# Altium PCB HDMI_Adapter_RevA.PcbDoc
Units mm, origin at the board's own origin, x right, y up, seen from the top; angles counter-clockwise.
Board outline 60 x 40 mm, 2 copper layers (Top Layer, Bottom Layer); 13 components, 11 nets, 74 pads, 8 vias.
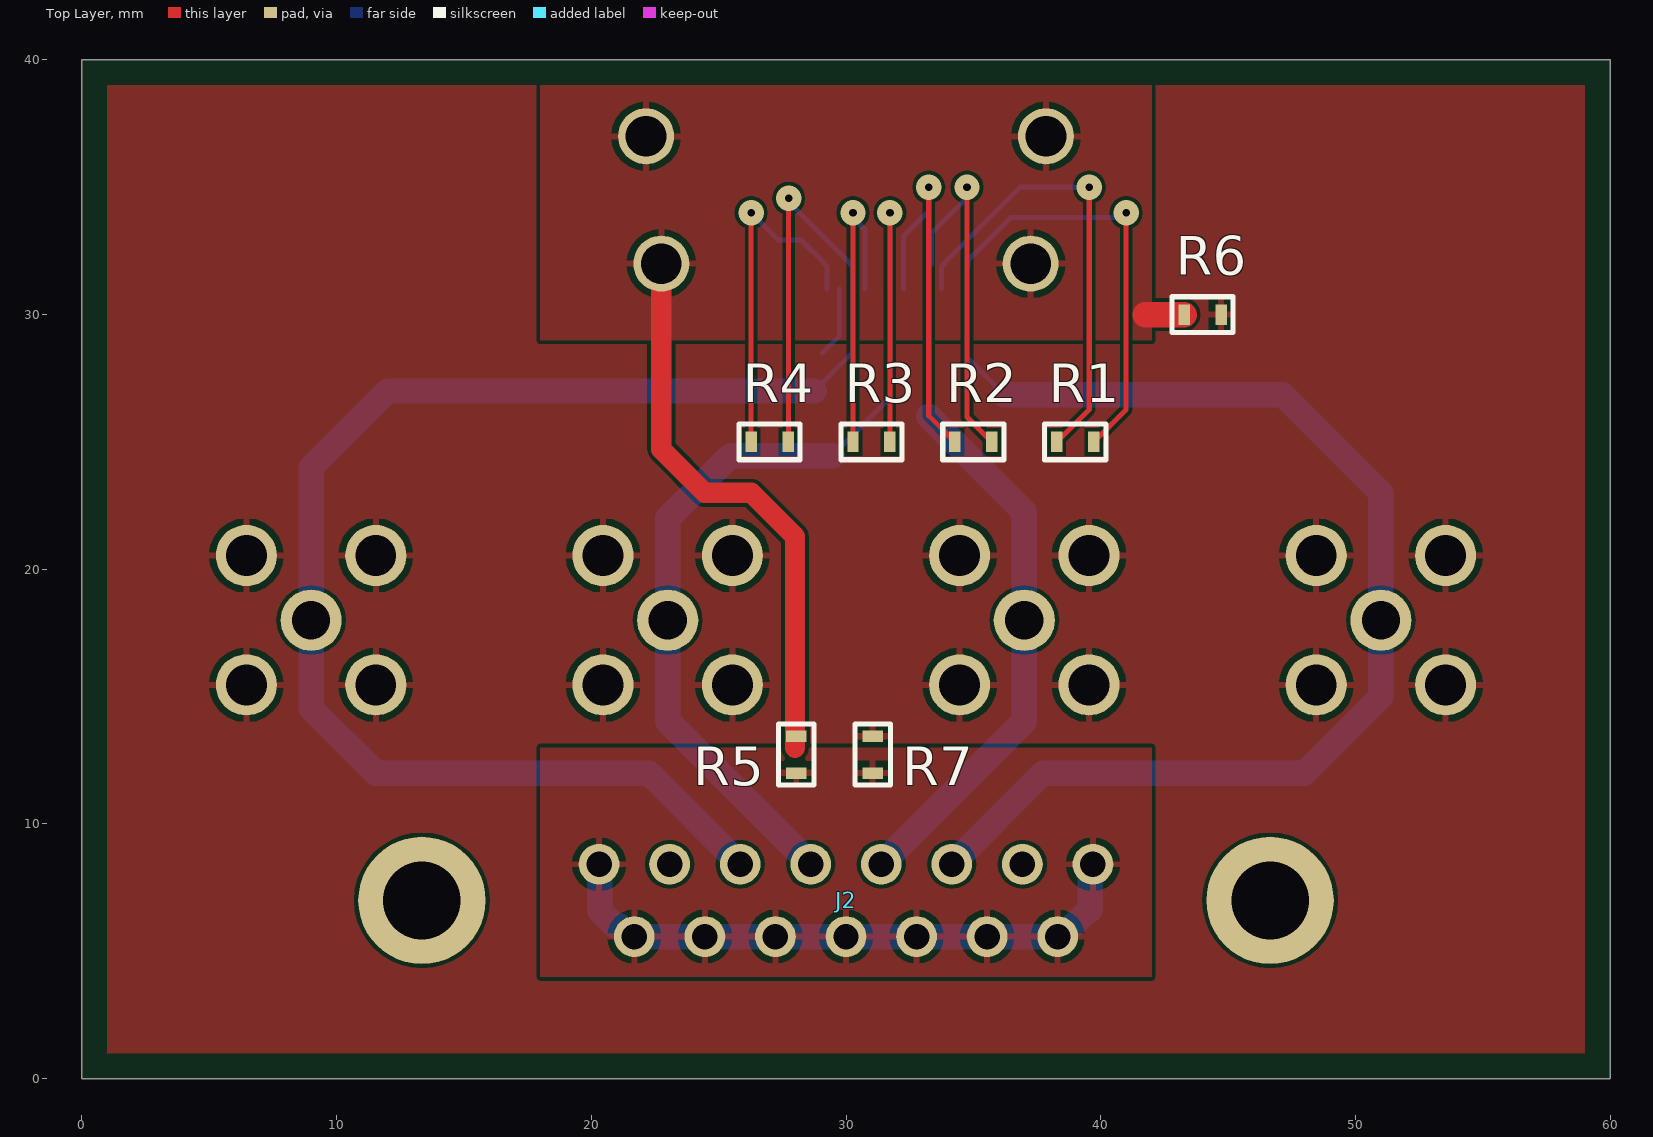
[diagram p0: Top Layer view]
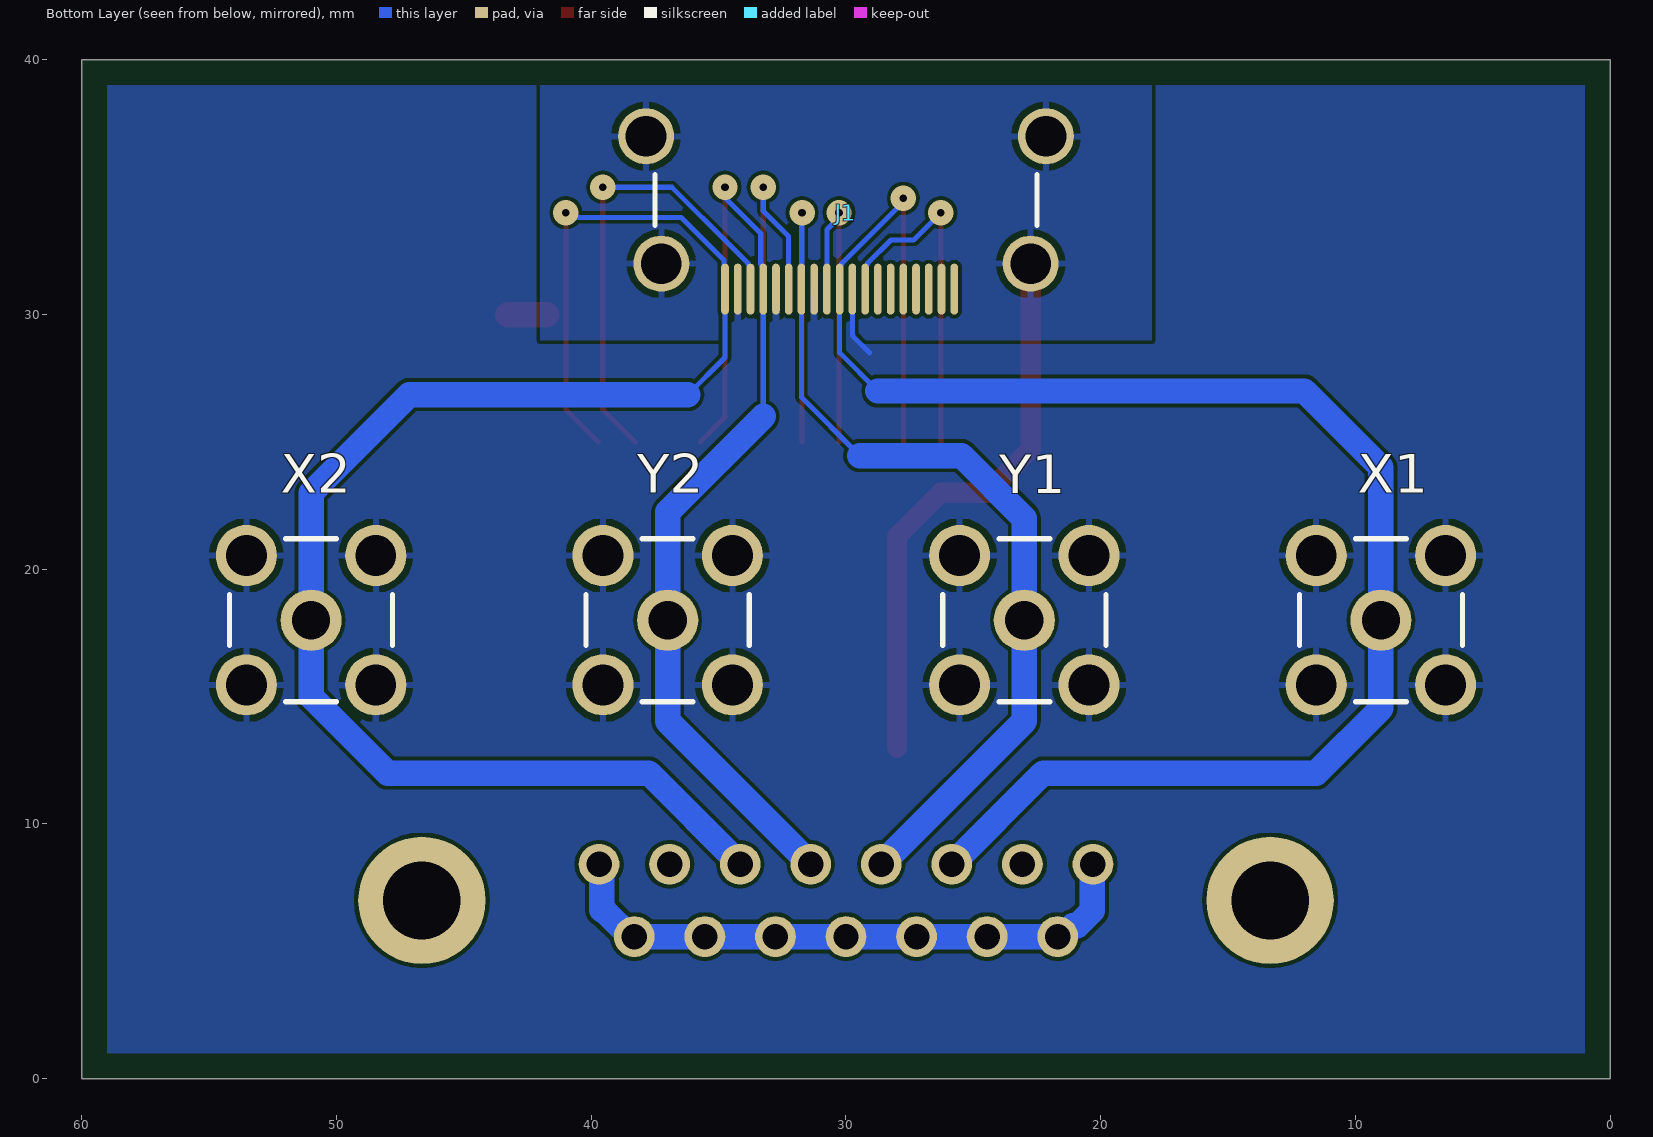
[diagram p1: Bottom Layer view, seen from below]
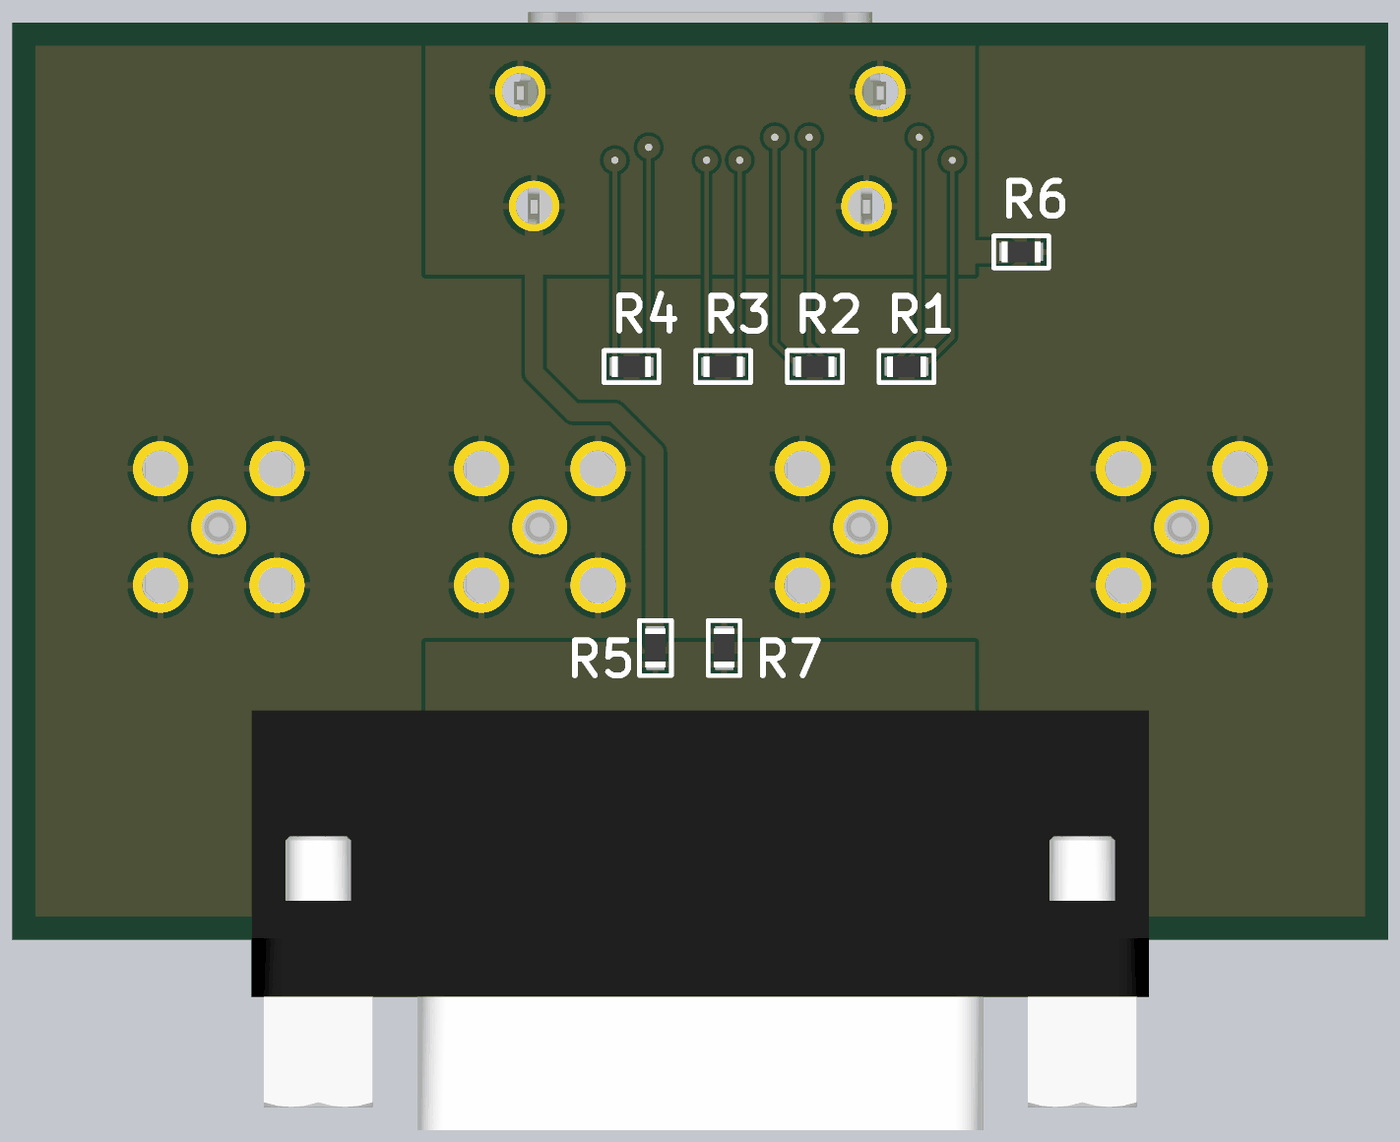
[diagram p2: 3D render of the assembled board from above, using the file's embedded part models]
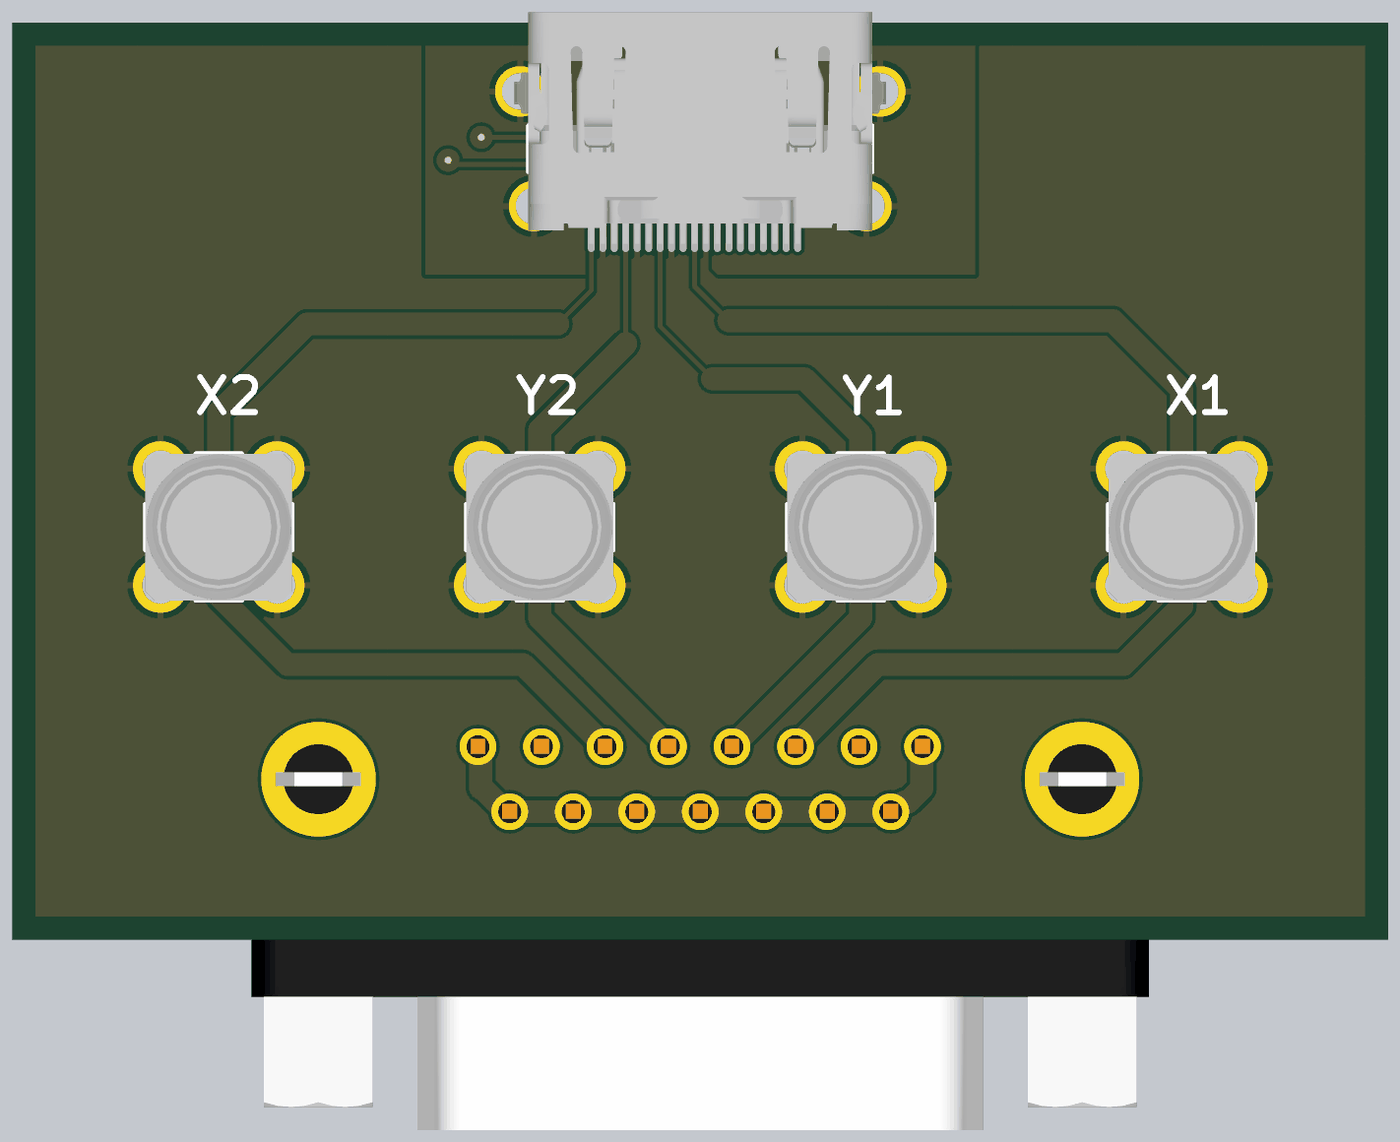
[diagram p3: 3D render of the assembled board from below, using the file's embedded part models]

## Layer stack, top to bottom
Top Solder: solder mask 0.0102, Solder Resist, Dk 3.5
Top Layer: signal copper 0.0356
Dielectric 1: dielectric 0.32, FR-4, Dk 4.8
Bottom Layer: signal copper 0.0356
Bottom Solder: solder mask 0.0102, Solder Resist, Dk 3.5

## Board outline
0,0 60,0 60,40 0,40

## Design rules (kind name [scope] priority, off if disabled: settings)
Clearance [All] p1: gap=0.152 ignorepadtopadclearanceinfootprint=FALSE
HoleSize [All] p1: absolutevalues=TRUE maxlimit=6.3 minlimit=0.3 maxpercent=80.000 minpercent=20.000
PolygonConnect [All] p1: connectstyle=Relief reliefconductorwidth=0.254 reliefentries=4 polygonreliefangle="90 Angle" airgapwidth=0.254
RoutingVias [All] p1: holewidth=0.711 width=1.27 viastyle="Through Hole" minholewidth=0.711 minwidth=1.27 maxholewidth=0.711 maxwidth=1.27
SolderMaskExpansion [All] p1: expansion=0
Width [All] p1: maxlimit=5 minlimit=0.152 preferedwidth=0.254
29 further rules are at their usual default settings.

## Components (designator, comment, footprint, x,y, rotation, side; value= is the part's Value field where it differs from the comment)
J1 "10029449-111RLF" 10029449-111RLF 30,32 r0 bottom
J2 "A-DF 15 A/KG-T2S" "A-DF 15 A/KG-T2S" 30,7 r0 top
R1 "RES 0R Jumper 1/10 W 0603" RES-0603-M 39,25 r180 top value=0R
R2 "RES 0R Jumper 1/10 W 0603" RES-0603-M 35,25 r180 top value=0R
R3 "RES 0R Jumper 1/10 W 0603" RES-0603-M 31,25 r180 top value=0R
R4 "RES 0R Jumper 1/10 W 0603" RES-0603-M 27,25 r0 top value=0R
R5 "RES 0R Jumper 1/10 W 0603" RES-0603-M 28.046,12.725 r90 top value=0R
R6 "RES 0R Jumper 1/10 W 0603" RES-0603-M 44,30 r0 top value=0R
R7 "RES 0R Jumper 1/10 W 0603" RES-0603-M 31.046,12.725 r90 top value=0R
X1 "5-1814832-1" 5-1814832-1 9,18 r180 bottom
X2 "5-1814832-1" 5-1814832-1 51,18 r180 bottom
Y1 "5-1814832-1" 5-1814832-1 23,18 r180 bottom
Y2 "5-1814832-1" 5-1814832-1 37,18 r180 bottom

## Footprints (in the part's own frame and the unit in brackets; to place one, negate y for a bottom-side part, rotate by r counter-clockwise, add the part's x,y. Pads: shape width x height; smd on the part's side, far side on the other; paste and mask are expansions set on the pad)
5-1814832-1 [mm]
  round 2.4 hole 1.5: 1(0,0)
  round 2.4 hole 1.6: MH(-2.54,-2.54) MH(-2.54,2.54) MH(2.54,-2.54) MH(2.54,2.54)
  silkscreen extent -3.2,-3.2 3.2,3.2, body extent -3.2,-3.2 3.2,3.2, height 9.5
10029449-111RLF [mm]
  oval 0.3x2 smd: 1(4.75,1) 2(4.25,1) 3(3.75,1) 4(3.25,1) 5(2.75,1) 6(2.25,1) 7(1.75,1) 8(1.25,1) 9(0.75,1) 10(0.25,1) 11(-0.25,1) 12(-0.75,1) 13(-1.25,1) 14(-1.75,1) 15(-2.25,1) 16(-2.75,1) 17(-3.25,1) 18(-3.75,1) 19(-4.25,1)
  round 2.2 hole 1.6: MH1(7.25,0) MH2(7.85,-5) MH3(-7.25,0) MH4(-7.85,-5)
  silkscreen extent -7.5,-3.5 7.5,-1.5, body extent -8.1,-8.45 8.1,1.65, height 6.28
"A-DF 15 A/KG-T2S" [mm]
  round 1.6 hole 1: 1(9.695,1.42) 2(6.925,1.42) 3(4.155,1.42) 4(1.385,1.42) 5(-1.385,1.42) 6(-4.155,1.42) 7(-6.925,1.42) 8(-9.695,1.42) 9(8.31,-1.42) 10(5.54,-1.42) 11(2.77,-1.42) 12(0,-1.42) 13(-2.77,-1.42) 14(-5.54,-1.42) 15(-8.31,-1.42)
  round 5 hole 3.05: MH1(16.65,0) MH2(-16.65,0)
  body extent -19.57,-15.3 19.57,3, height 12.77
RES-0603-M [mm] "Chip Resistor, 2-Leads, Body 1.60x0.80mm, IPC High Density"
  rect 0.45x0.8 smd: 1(-0.725,0) 2(0.725,0)
  silkscreen extent -1.2,-0.7 1.2,0.7, body extent -0.85,-0.45 0.85,0.45, height 0.55

## Part data
J2: "DA-15 Female, RIght Angle"
R1 R2 R3 R4 R5 R6 R7: library part RC0603FR-070RL, Manufacturer=Yageo, Manufacturer Series=RC, Package=0603, Power="1/10 W", Supplier Part Number 1=311-0.0HRCT-ND, Temperature Range="-55°C ~ 155°C", Tolerance=Jumper, Component Type=Standard, Part Number=RC0603FR-070RL, Supplier 1=Digi-Key

## Via types
v1: diameter 1, hole 0.3, Top Layer to Bottom Layer, tented both sides, 8 vias

## Nets (pads, with @x,y where several pads share a name; then routed paths per layer and width w, separated by ;. In a path a pad name is that pad's centre, name@x,y a point inside that pad or via, vN(x,y) a via of type N, cw(c..) or ccw(c..) an arc to the next point about the centre after c; other vN are vias at no path point)
GND: J1.2 J1.5 J1.8 J1.11 R6.2 R7.2 X1.MH X2.MH Y1.MH Y2.MH | length 2.8
  Bottom Layer w0.2: 29.079,28.5 29.75,29.171 J1.11
HDMI_SHLD: J1.MH1 J1.MH2 J1.MH3 J1.MH4 R5.2 R6.1 | length 23.8
  Top Layer w0.8: J1.MH3 22.75,24.71 24.46,23 26.275,23 28,21.275 28,13
  Top Layer w1: 41.752,30 R6.1
NetJ1_3: J1.3 R1.2 | length 18.5
  Top Layer w0.2: R1.2 39.55,26.275 v1(39.55,35)
  Bottom Layer w0.2: J1.3 33.75,31.877 33.848,31.975 33.848,32.017 34.463,32.632 34.47,32.632 36.837,35 v1(39.55,35)
NetJ1_6: J1.6 R2.2 | length 14.8
  Top Layer w0.2: v1(33.25,35) 33.25,26.025 R2.2
  Bottom Layer w0.2: J1.6 32.25,33.069 33.25,34.069 v1(33.25,35)
NetJ1_9: J1.9 R3.2 | length 12.2
  Top Layer w0.2: R3.2 v1(30.275,34)
  Bottom Layer w0.2: v1(30.275,34) 30.275,33.819 30.75,33.344 J1.9
NetJ1_12: J1.12 R4.1 | length 13.8
  Top Layer w0.2: R4.1 v1(26.275,34)
  Bottom Layer w0.2: v1(26.275,34) 27.343,32.932 28.237,32.932 29.152,32.017 29.152,31.975 29.25,31.877 J1.12
PAD_GND: J2.1 J2.8 J2.9 J2.10 J2.11 J2.12 J2.13 J2.14 J2.15 R5.1 R7.1 | length 23.8
  Bottom Layer w1: J2.8 20.34,8.385 20.34,6.586 20.926,6 21.108,6 21.528,5.58 J2.15 J2.14 J2.13 J2.12 J2.11 J2.10 J2.9 38.472,5.58 39.478,6.586 39.54,6.586 39.58,6.626 39.58,8.305 J2.1
X1: J1.10 J2.6 R4.2 X1.1 | length 68.6
  Top Layer w0.2: R4.2 27.75,25.025 v1(27.75,34.564)
  Bottom Layer w0.2: v1(27.75,34.564) 27.75,34.419 30.152,32.017 30.152,31.975 30.25,31.877 J1.10 30.25,28.5 28.75,27
  Bottom Layer w1: J2.6 22.265,12 11.54,12 9,14.54 X1.1 9,24 12,27 28.75,27
X2: J1.1 J2.3 R1.1 X2.1 | length 66.4
  Top Layer w0.2: R1.1 41,26.275 v1(41,34)
  Bottom Layer w0.2: 36.213,26.857 34.75,28.319 J1.1 34.75,31.816 34.796,31.863 34.796,32.14 36.475,33.819 40.819,33.819 v1(41,34)
  Bottom Layer w1: J2.3 37.735,12 48,12 51,15 X2.1 51,23 47.143,26.857 36.213,26.857
Y1: J1.7 J2.5 R3.1 Y1.1 | length 42.9
  Top Layer w0.2: R3.1 v1(31.725,34)
  Bottom Layer w0.2: 29.465,24.465 31.75,26.75 J1.7 31.738,31.013 31.738,33.987 v1(31.725,34)
  Bottom Layer w1: J2.5 23,14.035 Y1.1 23,22 25.465,24.465 29.465,24.465
Y2: J1.4 J2.4 R2.1 Y2.1 | length 41.5
  Top Layer w0.2: v1(34.75,35) 34.75,25.975 R2.1
  Bottom Layer w0.2: 33.25,26 J1.4 33.25,31.877 33.348,31.975 33.348,33.18 34.75,34.582 v1(34.75,35)
  Bottom Layer w1: J2.4 37,14.035 Y2.1 37,22.25 33.25,26
pads on no net: J1.13 J1.14 J1.15 J1.16 J1.17 J1.18 J1.19 J2.2 J2.7 J2.MH1 J2.MH2

## Polygon pours and split planes (outlines as drawn)
GND on Top Layer "Top Layer-GND" (solid, pour order 6): 1,39 59,39 59,1 1,1
PAD_GND on Top Layer "Top Layer-PAD_GND" (solid, pour order 2): 18,13 18,4 42,4 42,13
HDMI_SHLD on Top Layer "HDMI_SHLD_L01_P004" (solid, pour order 4): 18,39 18,29 42,29 42,39
GND on Bottom Layer "GND_L02_P010" (solid, pour order 10): 1,39 59,39 59,1 1,1
HDMI_SHLD on Bottom Layer "HDMI_SHLD_L02_P008" (solid, pour order 8): 18,39 18,29 42,29 42,39

## Silkscreen, mask and mechanical layers (free items; w line width, h text height)
Mechanical 1:
  the board outline again, w0.254